# Altium PCB PCB.PcbDoc
Units mil, origin at the board's own origin, x right, y up, seen from the top; angles counter-clockwise.
Board outline 4005 x 3685 mil, 2 copper layers (Top Layer, Bottom Layer); 32 components, 31 nets, 146 pads, 27 vias.
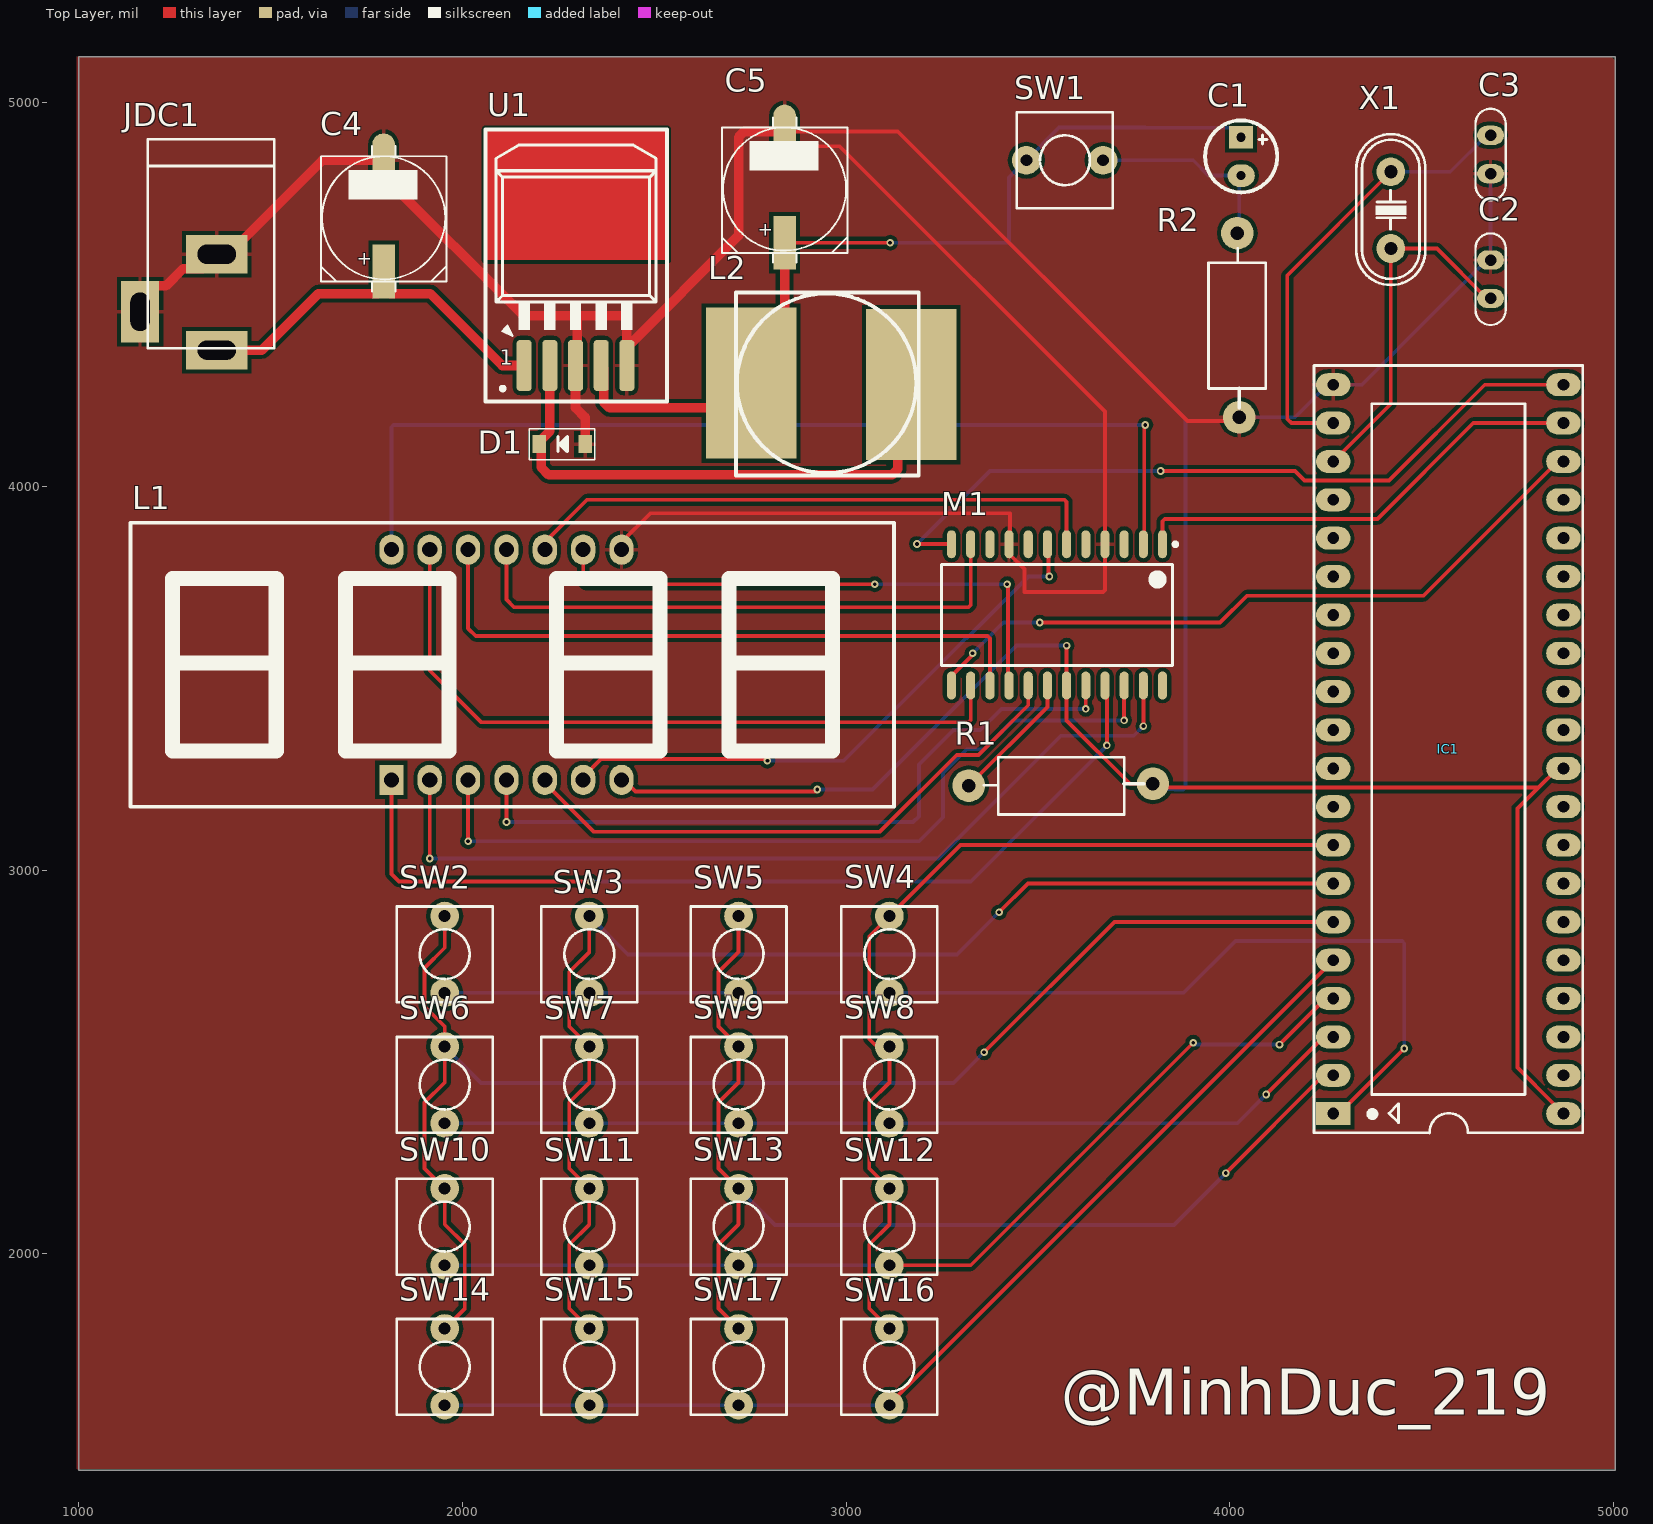
[diagram p0: Top Layer view]
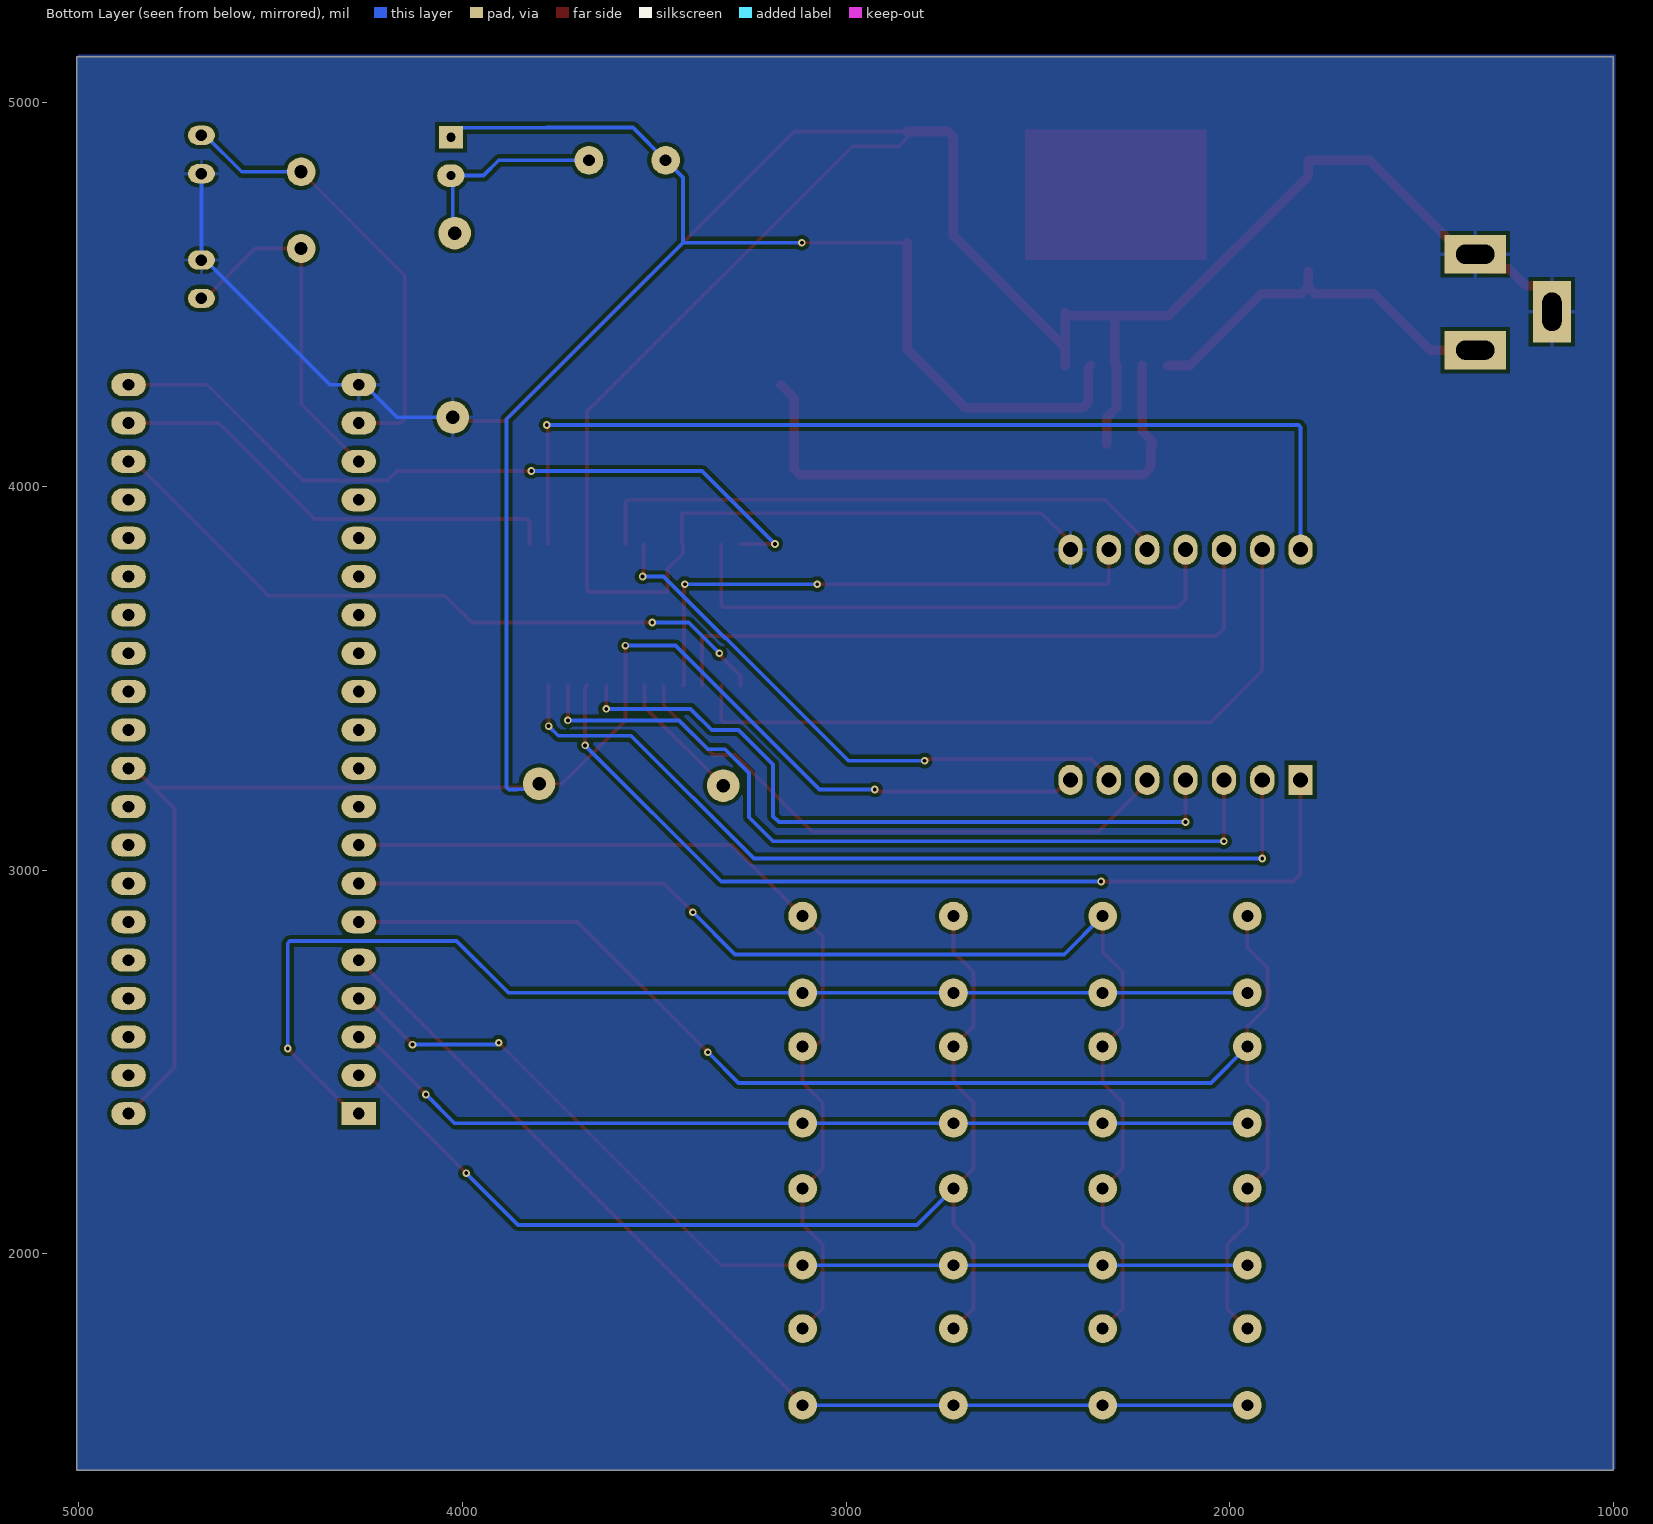
[diagram p1: Bottom Layer view, seen from below]

## Layer stack, top to bottom
Top Solder: solder mask 0.4, Solder Resist, Dk 3.5
Top Layer: signal copper 1.4
Dielectric 1: dielectric 12.6, FR-4, Dk 4.8
Bottom Layer: signal copper 1.4
Bottom Solder: solder mask 0.4, Solder Resist, Dk 3.5

## Board outline
1000,1435 5005,1435 5005,5120 1000,5120

## Design rules (kind name [scope] priority, off if disabled: settings)
Clearance [All] p1: gap=10 ignorepadtopadclearanceinfootprint=FALSE except(0: Arc-Hole Track-Hole SMDPad-Hole THPad-Hole Via-Hole Fill-Hole Poly-Hole Region-Hole Text-Hole)
PolygonConnect [All] p1: connectstyle=Relief reliefconductorwidth=10 reliefentries=4 polygonreliefangle="90 Angle" airgapwidth=10
RoutingVias [All] p1: holewidth=10 width=20 viastyle="Through Hole" minholewidth=28 minwidth=50 maxholewidth=28 maxwidth=50 useviatemplates=TRUE
SolderMaskExpansion [All] p1: expansion=4
Width [All] p1: maxlimit=40 minlimit=10 preferedwidth=25
30 further rules are at their usual default settings.

## Classes and differential pairs
component class 3: SW2 SW3 SW4 SW5 SW6 SW7 SW8 SW9 SW10 SW11 SW12 SW13 SW14 SW15 SW16 SW17
component class 2: C1 C2 C3 IC1 R2 SW1 X1
component class 1: L1 R1
component class Designator: C4 C5 D1 JDC1 L2 U1

## Components (designator, comment, footprint, x,y, rotation, side; value= is the part's Value field where it differs from the comment)
C1 "Cap Pol" C3MM 4030,4860 r270 top
C2 "Capacitor Ceramic" CAP_CERAMIC 4680,4590 r270 top value=33p
C3 "Capacitor Ceramic" CAP_CERAMIC 4680,4815 r90 top value=33p
C4 "CN-ALU-SMD" CAP-ALU-SMD-F 1795,4700 r90 top
C5 "CN-ALU-SMD" CAP-ALU-SMD-F 2840,4775 r90 top
D1 "1N5822" DIO-SMD-123 2260,4110 r0 top value="Diode c?m 1N5408"
IC1 "AT89C52" DIP40/W0.6 4270,2365 r90 top
JDC1 "Jac DC" DC-IN 1260,4480 r270 top
L1 "Led 7 Seg 4 digit - Anode" LED7SEG-4-0.56-RG 2135,3530 r0 top
L2 "100uH - 3A SMD" "Cuon Cam 12x12x10" 2713.31,4505.16 r270 top
M1 "MAX7219ENG" SO24 3550,3665 r270 top
R1 "1k" RES-1/2W 3580,3220 r180 top value="R1/4W - 1K"
R2 "1k" RES-1/2W 4020,4400 r90 top value="R1/4W - 1K"
SW1 "SW" SW2 3670,4850 r180 top value="SW chip 2 pin"
SW2 "SW" SW2 1954,2880 r270 top value="SW chip 2 pin"
SW3 "SW" SW2 2331,2880 r270 top value="SW chip 2 pin"
SW4 "SW" SW2 3113,2880 r270 top value="SW chip 2 pin"
SW5 "SW" SW2 2720,2880 r270 top value="SW chip 2 pin"
SW6 "SW" SW2 1954,2540 r270 top value="SW chip 2 pin"
SW7 "SW" SW2 2331,2540 r270 top value="SW chip 2 pin"
SW8 "SW" SW2 3113,2540 r270 top value="SW chip 2 pin"
SW9 "SW" SW2 2720,2540 r270 top value="SW chip 2 pin"
SW10 "SW" SW2 1954,2170 r270 top value="SW chip 2 pin"
SW11 "SW" SW2 2331,2170 r270 top value="SW chip 2 pin"
SW12 "SW" SW2 3113,2170 r270 top value="SW chip 2 pin"
SW13 "SW" SW2 2720,2170 r270 top value="SW chip 2 pin"
SW14 "SW" SW2 1954,1805 r270 top value="SW chip 2 pin"
SW15 "SW" SW2 2331,1805 r270 top value="SW chip 2 pin"
SW16 "SW" SW2 3113,1805 r270 top value="SW chip 2 pin"
SW17 "SW" SW2 2720,1805 r270 top value="SW chip 2 pin"
U1 "LM2976" TO263 2280,4550 r0 top
X1 "4Mhz" XT2 4420,4720 r270 top

## Footprints (in the part's own frame and the unit in brackets; to place one, negate y for a bottom-side part, rotate by r counter-clockwise, add the part's x,y. Pads: shape width x height; smd on the part's side, far side on the other; paste and mask are expansions set on the pad)
C3MM [mm]
  rect 1.5x1.58 hole 0.6: 1(-1.27,0)
  oval 1.5x1.8 hole 0.6: 2(1.27,0)
  silkscreen extent -2.39,-2.39 2.39,2.39, body extent -2,-2.03 2.01,1.97, height 7.01
CAP-ALU-SMD-F [mil]
  rect 140x59.06 smd: 1(-140,0)
  oval 140x59.06 smd: 2(150,0)
  silkscreen extent -192,-163 187,163, body extent -195,-163 195,163, height 402
CAP_CERAMIC [mil] "Tu gom mini"
  oval 50x70 hole 30: 1(0,0) 2(100,0)
  silkscreen extent -69,-39 169,39, body extent -65,-33 165,33, height 241
"Cuon Cam 12x12x10" [mm] "Cuon Cam 12x12x10"
  rect 10x6 smd: 1(6.1,11.6) 2(6,1)
  silkscreen extent 0,0 12.1,12.1, body extent 0.1,-0.2 12.1,12.14, height 7.51
DC-IN [mil] "Jac DC input"
  rect 100x160 hole 50 slot 100 at 90 deg: 1(125,100) 2(-125,100)
  rect 160x100 hole 50 slot 100 at 0 deg: 3(25,-100)
  silkscreen extent -425,-80 120,250, body extent -410,-105 134,269, height 434
DIO-SMD-123 [mm]
  rect 0.9x1.2 smd: 1(1.524,0) 2(-1.524,0)
  silkscreen extent -2.16,-1.02 2.16,1.02, body extent -1.76,-0.8 1.94,0.8, height 1.25
DIP40/W0.6 [mil] "40 PIN, W 600mil, Pin to pin 100mil"
  rect 60x90 hole 31: 1(0,0)
  oval 60x90 hole 31: 2(100,0) 3(200,0) 4(300,0) 5(400,0) 6(500,0) 7(600,0) 8(700,0) 9(800,0) 10(900,0) 11(1000,0) 12(1100,0) 13(1200,0) 14(1300,0) 15(1400,0) 16(1500,0) 17(1600,0) 18(1700,0) 19(1800,0) 20(1900,0) 21(1900,-600) 22(1800,-600) 23(1700,-600) 24(1600,-600) 25(1500,-600) 26(1400,-600) 27(1300,-600) 28(1200,-600) 29(1100,-600) 30(1000,-600) 31(900,-600) 32(800,-600) 33(700,-600) 34(600,-600) 35(500,-600) 36(400,-600) 37(300,-600) 38(200,-600) 39(100,-600) 40(0,-600)
  silkscreen extent -50,-650 1950,50, body extent -82,-600 1982,10, height 224
LED7SEG-4-0.56-RG [mil]
  round 60 on Top Overlay: 0(-535,-205) 0(-85,-205) 0(465,-205) 0(915,-205)
  round 118.11 on Top Overlay: 0(-20,-95) 0(-20,155)
  rect 62.99x78.74 hole 39.37: 1(-320,-295)
  oval 62.99x78.74 hole 39.37: 2(-220,-295) 3(-120,-295) 4(-20,-295) 5(80,-295) 6(180,-295) 7(280,-295) 8(280,305) 9(180,305) 10(80,305) 11(-20,305) 12(-120,305) 13(-220,305) 14(-320,305)
  silkscreen extent -1000,-365 990,375, body extent -995,-370 985,378, height 565
RES-1/2W [mil]
  round 85 hole 35: 1(-220,-5) 2(260,0)
  silkscreen extent -195,-74 221,75, body extent -230,-60 270,56, height 121
SO24 [mm] "SOIC, 24-Leads, Body 15.30x7.50mm, Pitch 1.27mm, IPC Medium Density"
  oval 1.85x0.6 smd: 1(-4.675,6.985) 2(-4.675,5.715) 3(-4.675,4.445) 4(-4.675,3.175) 5(-4.675,1.905) 6(-4.675,0.635) 7(-4.675,-0.635) 8(-4.675,-1.905) 9(-4.675,-3.175) 10(-4.675,-4.445) 11(-4.675,-5.715) 12(-4.675,-6.985) 13(4.675,-6.985) 14(4.675,-5.715) 15(4.675,-4.445) 16(4.675,-3.175) 17(4.675,-1.905) 18(4.675,-0.635) 19(4.675,0.635) 20(4.675,1.905) 21(4.675,3.175) 22(4.675,4.445) 23(4.675,5.715) 24(4.675,6.985)
  silkscreen extent -4.8,-7.65 3.35,7.96, body extent -5.2,-7.83 5.2,7.57, height 2.6
SW2 [mil] "SW button 2pin, 250x 250 mil"
  round 75 hole 31: 1(0,0) 2(200,0)
  silkscreen extent -25,-125 225,125
TO263 [mm]
  rrect50% 1x3.4 smd: 1(-3.019,-5.969) 2(-1.319,-5.969) 4(2.081,-5.969) 5(3.781,-5.969)
  rrect50% 1x3.4 smd mask+0: 3(0.381,-5.969)
  Top Layer region: -5.568,1.016 6.432,1.016 6.432,9.65 -5.568,9.65
  silkscreen extent -5.57,-8.35 6.43,9.65, body extent -4.73,-6.84 5.43,7.8, height 4.57
XT2 [mil] "Footpin for Crystal 2 pin"
  round 75 hole 34: 1(-100,0) 2(100,0)
  silkscreen extent -198,-90 195,90, body extent -233,-93 213,90, height 138

## Part data
C1: "Polarized Capacitor (Axial)", LatestRevisionDate=17-Jul-2002, LatestRevisionNote="Re-released for DXP Platform.", PackageReference=POLAR0.8, Published=8-Jun-2000, Publisher="Altium Limited"
C2 C3: library part CapCeramic, "Capacitor", LatestRevisionDate=17-Jul-2002, LatestRevisionNote="Re-released for DXP Platform.", PackageReference=RAD-0.3, Published=8-Jun-2000, Publisher="Altium Limited"
C4 C5: library part CAP-ALU-SMD, "Polarized Capacitor (Axial)", LatestRevisionDate=17-Jul-2002, LatestRevisionNote="Re-released for DXP Platform.", PackageReference=POLAR0.8, Published=8-Jun-2000, Publisher="Altium Limited"
D1: "Schottky Rectifiers"
IC1: "Atmel AT89C52, 8k Byte Flash Memory , 40 Pin"
JDC1: library part DCIN, "Jac DC input"
L1: library part LED7SEG-4-RG
L2: library part "CUON CAM 100uH SMD", "Dán", Chung_Loai=Dán, Don_Vi=Con, Ma_Hang=MH003999, Ten_Linh_Kien="Cu?n C?m 100uH 7x7x4MM CD74"
M1: "Serially Interfaced, 8-Digit LED Display Driver", Code_JEDEC=MS-001-AF, ComponentLink1Description="Manufacturer Link", ComponentLink1URL=http://www.maxim-ic.com/, ComponentLink2Description=Datasheet, ComponentLink2URL=http://pdfserv.maxim-ic.com/en/ds/MAX7219-MAX7221.pdf, DatasheetVersion=Jul-1997, LatestRevisionDate=29-May-2009, LatestRevisionNote="Component Body Added.", PackageDescription="DIP, 24-Pin, Row Spacing 7.62 mm, Pitch 2.54 mm", PackageReference=NG24A, PackageVersion=1997, Published=16-Jan-2001, Publisher="Altium Limited"
R1 R2: library part "Resistor - DIP", "Resistor - DIP"
SW1 SW2 SW3 SW4 SW5 SW6 SW7 SW8 SW9 SW10 SW11 SW12 SW13 SW14 SW15 SW16 SW17: library part SW2, "Switch button 2 pin"
U1: library part LM2596, Max Input Voltage="12 V", Max Output Current="3 (6.0 peak) A", Max Output Voltage=mV, Temperature Range="-40 to +125 degC", Category=IC-Power, Min Input Voltage=mV, Min Output Voltage=mV, Mounting Technology="Surface Mount", Status=Unreleased, Supply Voltage=mV
X1: library part XT2, "Crystal For all Crystal 2pin."

## Via types
v1: diameter 20, hole 10, Top Layer to Bottom Layer, 27 vias

## Nets (pads, with @x,y where several pads share a name; then routed paths per layer and width w, separated by ;. In a path a pad name is that pad's centre, name@x,y a point inside that pad or via, vN(x,y) a via of type N, cw(c..) or ccw(c..) an arc to the next point about the centre after c; other vN are vias at no path point)
+5: C1.1 C5.1 IC1.31 IC1.40 L1.7 L2.2 M1.19 R1.1 SW1.2 U1.4 | length 7881.3
  Top Layer w10: L1.7 2421.47,3235 2451.47,3205 2920,3205 v1(2925,3210) ; C5.1 v1(3115,4635) ; v1(3575,3585) M1.19 3575,3390 3740,3225 R1.1 3810,3215 4805,3215 ; IC1.40 4868.53,2365 4845.43,2388.1 4845.43,2389.57 4750,2485 4750,3160 4805,3215 ; IC1.31 4855,3265 4805,3215
  Top Layer w25: U1.4 2369.11,4307.81 2369.11,4219.11 2383.76,4204.47 2688.21,4204.47 L2.2 2840,4356.26 C5.1
  Bottom Layer w10: v1(2925,3210) 3069.06,3210 3444.06,3585 v1(3575,3585) ; v1(3115,4635) 3425,4635 ; R1.1 3814.35,3210.65 3856.57,3210.65 3857.22,3210 3879.14,3210 3885,3215.86 3885,4175 3425,4635 ; C1.1 4005.47,4934.53 3779.68,4934.53 3779.21,4935 3555,4935 SW1.2 3425,4805 3425,4635
GND: C2.1 C3.1 C4.2 C5.2 D1.1 IC1.20 JDC1.2 JDC1.3 L1.8 M1.4 M1.9 R2.1 U1.3 U1.5 | length 8593.9
  Top Layer w10: L1.8 2415,3855 2490,3930 3427.61,3930 3427.61,3851.66 M1.9 3425,3824.45 3465,3784.45 3465,3725 3670,3725 3675,3730 M1.4 3675,4195 2983.35,4886.65 2862.66,4886.65 2840,4909.31 C5.2 3135,4925 3890,4170 4015,4170 R2.1
  Top Layer w25: JDC1.3 1160,4485 1197.5,4522.5 1227.5,4522.5 1272.5,4567.5 1322.5,4567.5 JDC1.2 1390,4605 1635,4850 C4.2 1795,4809.53 2159.53,4445 2285.36,4445 ; D1.1 2320,4180 2295,4205 U1.3 2300,4320 2300,4430.36 2285.36,4445 ; U1.5 U1.5@2428.86,4362.24 ; C5.2 2734.64,4925 2720,4910.36 2720,4653.39 U1.5@2428.86,4362.24 ; 2285.36,4445 2420.04,4445 2428.86,4453.82 U1.5@2428.86,4362.24
  Bottom Layer w10: R2.1 4170,4180 4255,4265 IC1.20 4345,4265 4670,4590 C2.1 C3.1
LED1: L1.14 M1.2 | length 2599.6
  Top Layer w10: M1.2 3777.5,3851.56 3777.5,4157.5 v1(3780,4160)
  Bottom Layer w10: L1.14 1815,4154.14 1820.86,4160 v1(3780,4160)
LED2: L1.11 M1.11 | length 1508.9
  Top Layer w10: L1.11 2115,3705 2135,3685 3319.14,3685 3325,3690.86 M1.11
LED3: L1.10 M1.6 | length 1538.1
  Top Layer w10: L1.10 2215,3855 2325,3965 3569.14,3965 3575,3959.14 M1.6
LED4: L1.6 M1.7 | length 1528.9
  Top Layer w10: L1.6 2315,3242.87 2361.5,3289.37 2790.63,3289.37 v1(2795,3285) ; M1.7 3527.5,3846.56 3527.5,3767.5 v1(3530,3765)
  Bottom Layer w10: v1(2795,3285) 2993.43,3285 3313.43,3605 3315.36,3605 3475.36,3765 v1(3530,3765)
NetC4_1: C4.1 JDC1.1 U1.1 | length 994.5
  Top Layer w25: JDC1.1 1477.5,4355 1625,4502.5 1777.97,4502.5 C4.1@1795,4519.53 ; C4.1 C4.1@1795,4519.53 ; U1.1 2103.96,4315 1916.46,4502.5 1812.03,4502.5 C4.1@1795,4519.53
NetD1_2: D1.2 L2.1 U1.2 | length 1457.7
  Top Layer w25: U1.2 2228.07,4143.98 2200,4115.91 D1.2 2205.22,4104.78 2205.22,4049.78 2225,4030 3120,4030 3134.64,4044.64 3134.64,4229.64 L2.1
NetIC1_1: IC1.1 SW2.2 SW3.2 SW4.2 SW5.2 | length 3088.9
  Top Layer w10: IC1.1 4285,2365 v1(4455,2535)
  Bottom Layer w10: SW2.2 SW3.2 SW5.2 SW4.2 3880,2680 4015,2815 4449.14,2815 4455,2809.14 v1(4455,2535)
NetIC1_2: IC1.2 SW5.1 SW9.1 SW13.1 SW17.1 | length 2956.4
  Top Layer w10: SW17.1 2667.5,1857.5 2667.5,2024.08 2720,2076.58 SW13.1 2667.5,2222.5 2667.5,2394.08 2720,2446.58 SW9.1 2667.5,2592.5 2667.5,2734.08 2720,2786.58 SW5.1 ; v1(3990,2210) 4245,2465 IC1.2
  Bottom Layer w10: SW13.1 2815,2075 3855,2075 v1(3990,2210)
NetIC1_3: IC1.3 SW6.2 SW7.2 SW8.2 SW9.2 | length 2409.2
  Top Layer w10: v1(4095,2415) 4245,2565 IC1.3
  Bottom Layer w10: SW6.2 SW7.2 SW9.2 SW8.2 4020,2340 v1(4095,2415)
NetIC1_4: IC1.4 SW10.2 SW11.2 SW12.2 SW13.2 | length 2608
  Top Layer w10: SW12.2 3325,1970 v1(3905,2550) ; v1(4130,2545) 4250,2665 IC1.4
  Bottom Layer w10: SW10.2 SW11.2 SW13.2 SW12.2 ; v1(3905,2550) 3910,2545 v1(4130,2545)
NetIC1_5: IC1.5 SW14.2 SW15.2 SW16.2 SW17.2 | length 2799.1
  Top Layer w10: SW16.2 3113,1608 4245.43,2740.43 4245.43,2741.9 4268.53,2765 IC1.5
  Bottom Layer w10: SW14.2 SW15.2 SW17.2 SW16.2
NetIC1_6: IC1.6 SW2.1 SW6.1 SW10.1 SW14.1 | length 3734.8
  Top Layer w10: SW14.1 2006.5,1857.5 2006.5,2024.08 1954,2076.58 SW10.1 1901.5,2222.5 1901.5,2394.08 1954,2446.58 SW6.1 1954,2592.54 1901.5,2645.04 1901.5,2744.96 1954,2797.46 SW2.1 ; v1(3360,2525) 3700,2865 IC1.6
  Bottom Layer w10: SW6.1 2049,2445 3280,2445 v1(3360,2525)
NetIC1_7: IC1.7 SW3.1 SW7.1 SW11.1 SW15.1 | length 3262.5
  Top Layer w10: SW15.1 2278.5,1857.5 2278.5,2024.08 2331,2076.58 SW11.1 2278.5,2222.5 2278.5,2394.08 2331,2446.58 SW7.1 2278.5,2592.5 2278.5,2734.08 2331,2786.58 SW3.1 ; v1(3399.14,2890) 3474.14,2965 IC1.7
  Bottom Layer w10: SW3.1 2431,2780 3289.14,2780 v1(3399.14,2890)
NetIC1_8: IC1.8 SW4.1 SW8.1 SW12.1 SW16.1 | length 2458.4
  Top Layer w10: SW16.1 3060.5,1857.5 3060.5,2024.08 3113,2076.58 SW12.1 3060.5,2222.5 3060.5,2394.08 3113,2446.58 SW8.1 3108,2545 3075,2545 3060.5,2559.5 3060.5,2827.5 SW4.1 3298,3065 IC1.8
NetIC1_21: IC1.21 M1.12 | length 1968
  Top Layer w10: v1(3185,3850) 3274.06,3850 M1.12 ; v1(3820,4040) 4170,4040 4195,4015 4415,4015 4665,4265 IC1.21
  Bottom Layer w10: v1(3185,3850) 3375,4040 v1(3820,4040)
NetIC1_22: IC1.22 M1.1 | length 1211.1
  Top Layer w10: M1.1 3825,3909.14 3830.86,3915 4385,3915 4635,4165 IC1.22
NetIC1_23: IC1.23 M1.13 | length 1853.9
  Top Layer w10: M1.13 3275,3505.55 3330,3560.55 v1(3330,3565) ; v1(3505,3645) 3975,3645 4045,3715 4505,3715 4855,4065 IC1.23
  Bottom Layer w10: v1(3330,3565) 3410,3645 v1(3505,3645)
NetL1_1: L1.1 M1.21 | length 2423.3
  Top Layer w10: L1.1 1815,2990 1835,2970 v1(2335,2970) ; M1.21 3680,3475.94 v1(3680,3325)
  Bottom Layer w10: v1(2335,2970) 3325,2970 v1(3680,3325)
NetL1_2: L1.2 M1.23 | length 2313.8
  Top Layer w10: v1(1915,3030) L1.2 ; v1(3775,3375) M1.23
  Bottom Layer w10: v1(1915,3030) 3240,3030 3560,3350 3750,3350 v1(3775,3375)
NetL1_3: L1.3 M1.22 | length 2158.8
  Top Layer w10: v1(2015,3075) L1.3 ; v1(3725,3390) M1.22
  Bottom Layer w10: v1(2015,3075) 3190,3075 3252.5,3137.5 3252.5,3252.5 3315,3315 3360,3315 3435,3390 v1(3725,3390)
NetL1_4: L1.4 M1.20 | length 1882.2
  Top Layer w10: v1(2115,3125) L1.4 ; v1(3625,3420) M1.20
  Bottom Layer w10: v1(2115,3125) 3175,3125 3190,3140 3190,3275 3280,3365 3350,3365 3405,3420 v1(3625,3420)
NetL1_5: L1.5 M1.17 | length 1508.4
  Top Layer w10: L1.5 2215,3227.13 2342.13,3100 3088.51,3100 3288.51,3300 3345.47,3300 3475,3429.53 M1.17
NetL1_9: L1.9 M1.16 | length 1457.7
  Top Layer w10: L1.9 2315,3750.86 2320.86,3745 v1(3075,3745) ; v1(3420,3745) 3422.5,3742.5 3422.5,3483.44 M1.16
  Bottom Layer w10: v1(3075,3745) v1(3420,3745)
NetL1_12: L1.12 M1.15 | length 1698.9
  Top Layer w10: L1.12 2015,3630 2035,3610 3369.14,3610 3375,3604.14 M1.15
NetL1_13: L1.13 M1.14 | length 1873.4
  Top Layer w10: L1.13 1915,3520 2050,3385 3319.14,3385 3325,3390.86 M1.14
NetM1_18: M1.18 R1.2 | length 345.9
  Top Layer w10: R1.2 3525,3425 M1.18
RESET: C1.2 R2.2 SW1.1 | length 530.7
  Bottom Layer w10: SW1.1 3905,4850 3945,4810 C1.2 4025,4805 4025,4665 R2.2
XTAL1: C2.2 IC1.18 X1.2 | length 931.8
  Top Layer w10: IC1.18 4271.47,4065 4294.57,4088.1 4294.57,4089.57 4420,4215 X1.2 4540,4620 4670,4490 C2.2
XTAL2: C3.2 IC1.19 X1.1 | length 1179.8
  Top Layer w10: IC1.19 4160.86,4165 4150,4175.86 4150,4550 X1.1
  Bottom Layer w10: X1.1 4575,4820 4670,4915 C3.2
pads on no net: IC1.9 IC1.10 IC1.11 IC1.12 IC1.13 IC1.14 IC1.15 IC1.16 IC1.17 IC1.24 IC1.25 IC1.26 IC1.27 IC1.28 IC1.29 IC1.30 IC1.32 IC1.33 IC1.34 IC1.35 IC1.36 IC1.37 IC1.38 IC1.39 L1.0 M1.3 M1.5 M1.8 M1.10 M1.24

## Polygon pours and split planes (outlines as drawn)
GND on Top Layer "Top Layer-GND" (solid, pour order 8): 4995,5120 5005,5110 5005,1440 1005,1440 1000,1435 995,1440 995,5120
GND on Bottom Layer "Bottom Layer-GND" (solid, pour order 10): 995,5125 5000,5125 5005,5120 5005,1435 1000,1435 995,1440

## Silkscreen, mask and mechanical layers (free items; w line width, h text height)
Top Overlay:
  text "@MinhDuc_219" at 3560,1580 h120
Mechanical 1:
  the board outline again, w19.68

## Text inside footprints (layer, text, board x,y; h text height)
C4: Top Overlay "+" at 1759.57,4573.03 h35 r90
C5: Top Overlay "+" at 2804.57,4648.03 h35 r90
U1: Top Overlay "1" at 2097.14,4317 h39.37